# Altium PCB TinyArduino.PcbDoc
Units mil, origin at the board's own origin, x right, y up, seen from the top; angles counter-clockwise.
Board outline 1475 x 465 mil, 4 copper layers (Top Layer, GND_layer, 5V_layer, Bottom Layer), stack 23.756 mil thick; 13 components, 12 nets, 45 pads, 3 vias.
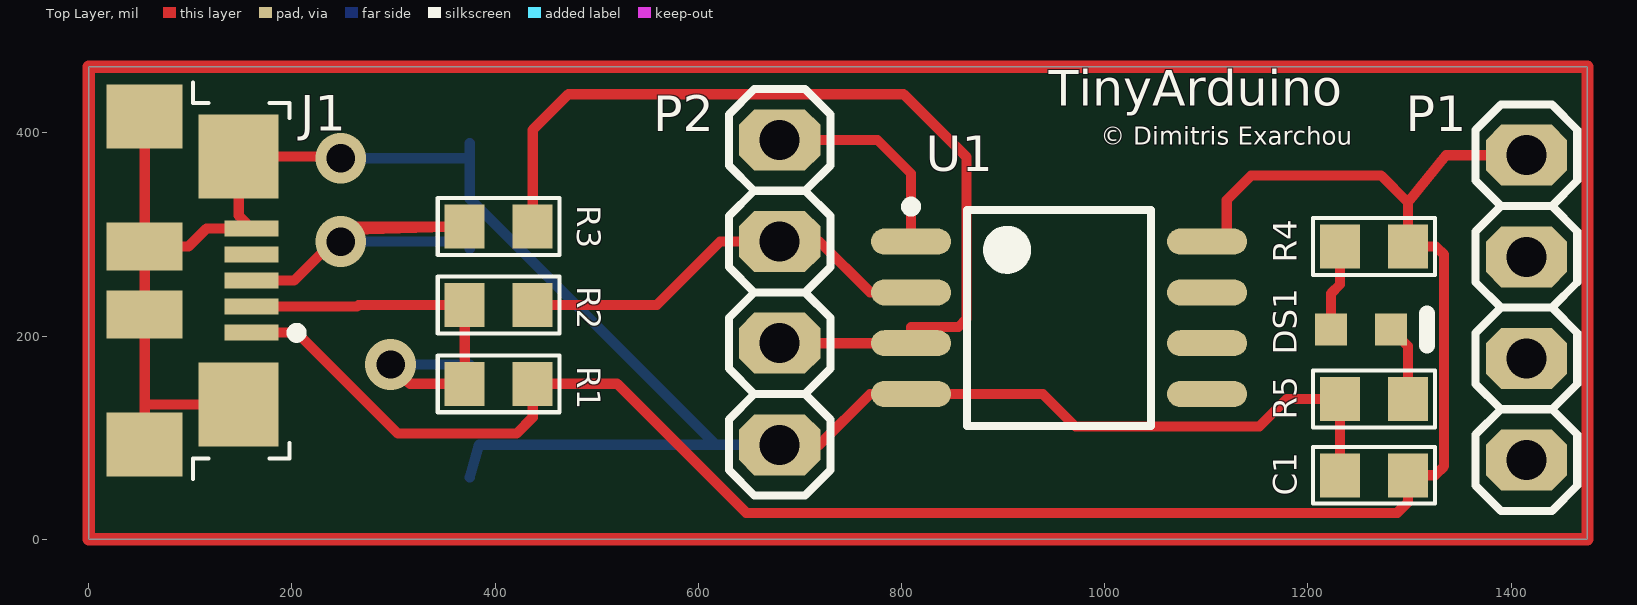
[diagram p0: Top Layer view]
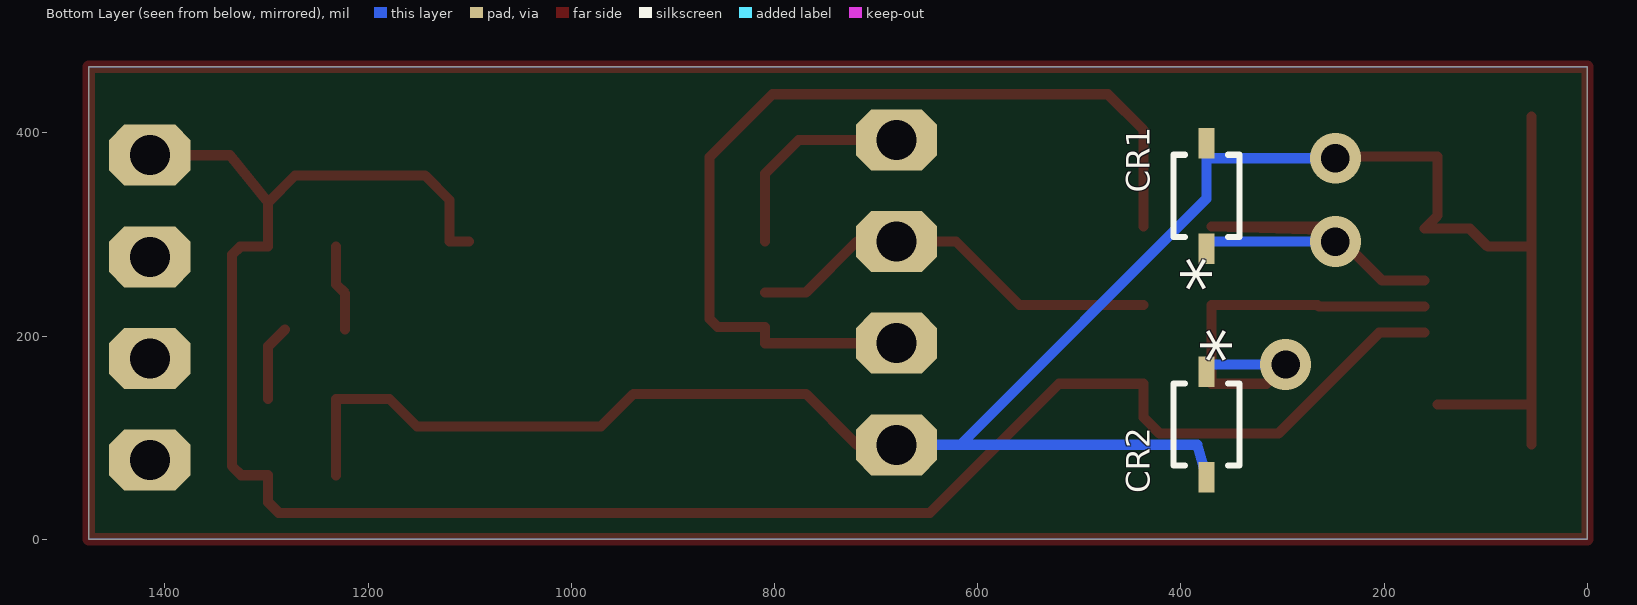
[diagram p1: Bottom Layer view, seen from below]
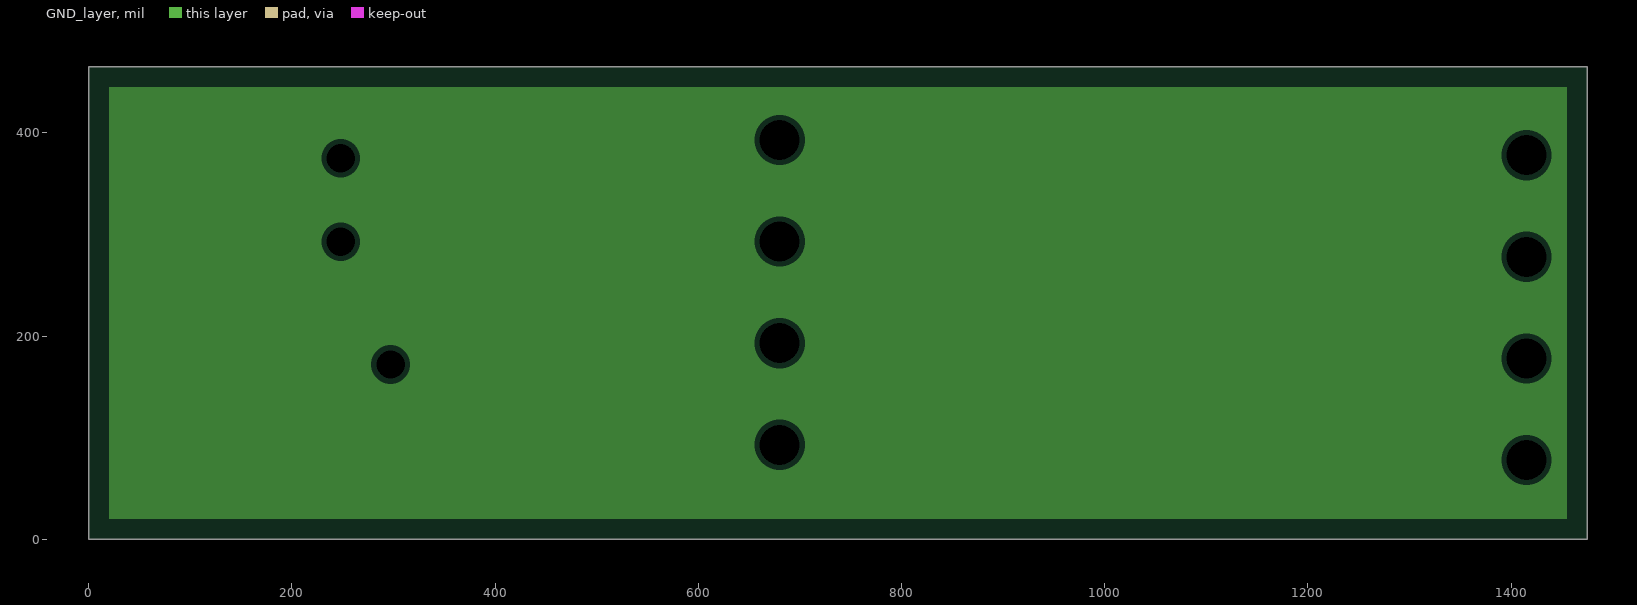
[diagram p2: GND_layer, clearances drawn from the general rule]
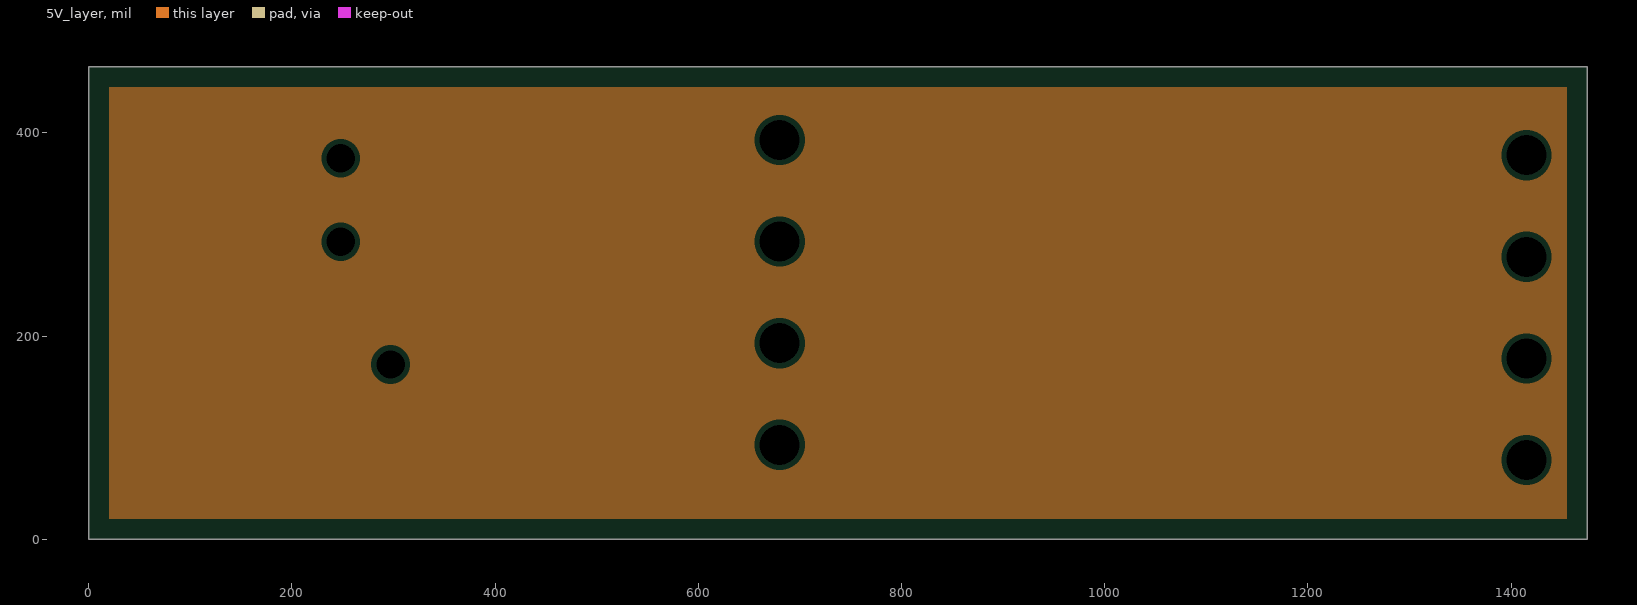
[diagram p3: 5V_layer, clearances drawn from the general rule]
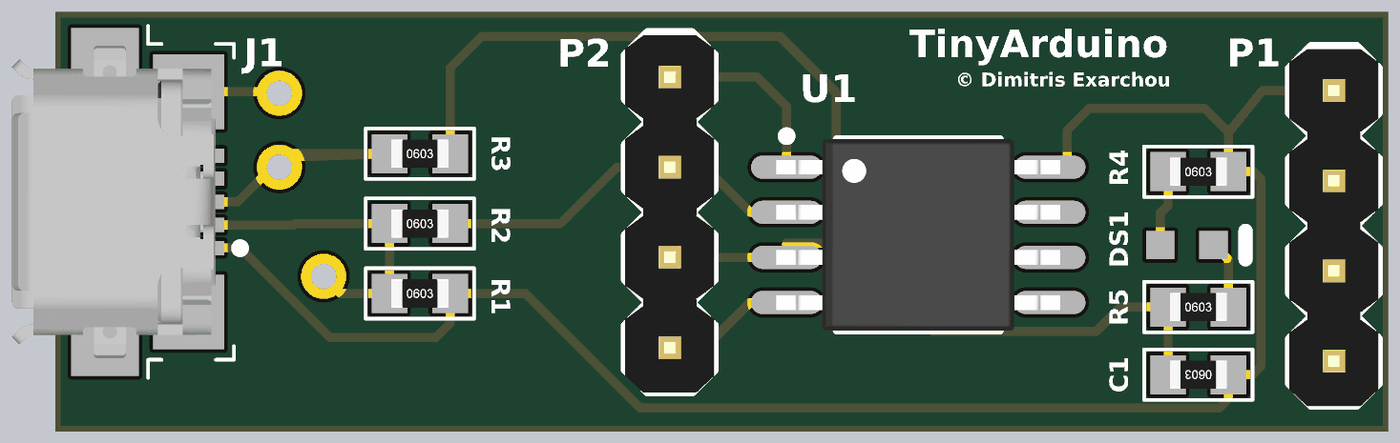
[diagram p4: 3D render of the assembled board from above, using the file's embedded part models]

## Layer stack, top to bottom
Top Solder: solder mask 0.4, Solder Resist, Dk 3.5
Top Layer: signal copper 1.4
Dielectric 2: prepreg 2.8, PP-006, Dk 4.1
GND_layer: plane copper 1.378
Dielectric 1: dielectric 12.6, FR-4, Dk 4.8
5V_layer: plane copper 1.378
Dielectric 3: prepreg 2.8, PP-006, Dk 4.1
Bottom Layer: signal copper 1.4
Bottom Solder: solder mask 0.4, Solder Resist, Dk 3.5

## Board outline
0,0 1475,0 1475,465 0,465

## Design rules (kind name [scope] priority, off if disabled: settings)
Clearance [All] p1: gap=10 ignorepadtopadclearanceinfootprint=FALSE except(0: Arc-Hole Track-Hole SMDPad-Hole THPad-Hole Via-Hole Fill-Hole Poly-Hole Region-Hole Text-Hole; 5: SMDPad-SMDPad)
PlaneClearance [All] p1: clearance=5
PlaneConnect [All] p1: planeconnectstyle=Relief reliefexpansion=20 reliefentries=4 reliefconductorwidth=10 reliefairgap=10
PolygonConnect [All] p1: connectstyle=Relief reliefconductorwidth=10 reliefentries=4 polygonreliefangle="90 Angle" airgapwidth=10
RoutingVias [All] p1: holewidth=28 width=50 viastyle="Through Hole" minholewidth=28 minwidth=50 maxholewidth=28 maxwidth=50
SilkToSilkClearance [All] p1: silktosilkclearance=12
SolderMaskExpansion [All] p1: expansion=4 istentingtop=FALSE
Width [All] p1: maxlimit=20 minlimit=5 preferedwidth=10
27 further rules are at their usual default settings.

## Classes and differential pairs
component class TinyArduino: C1 CR1 CR2 DS1 P1 P2 R1 R2 R3 R4 R5 U1

## Components (designator, comment, footprint, x,y, rotation, side; value= is the part's Value field where it differs from the comment)
C1 "100nF" MY_0603 1265,62.97 r180 top
CR1 "B0540WS-7" SOD323_DIO 375,337.97 r90 bottom
CR2 "B0540WS-7" SOD323_DIO 375,112.97 r270 bottom
DS1 "HSMG-C190" AVAG-HSMX-C190_V 1252.27,206.59 r0 top
J1 "ZX62R-B-5P" HIRO-ZX62R-B-5P_V 107.66,254.51 r270 top
P1 "Header 4" My_1X04 1415,227.97 r90 top
P2 "Header 4" My_1X04 680,242.97 r90 top
R1 "1.5K" MY_0603 403.46,152.97 r0 top
R2 "68R" MY_0603 403.46,230.47 r0 top
R3 "68R" MY_0603 403.46,307.97 r0 top
R4 "390R" MY_0603 1265,287.97 r0 top
R5 "0R" MY_0603 1265,137.97 r0 top
U1 "ATtiny85-20SU" ATML-8S2_M 955,217.97 r0 top

## Footprints (in the part's own frame and the unit in brackets; to place one, negate y for a bottom-side part, rotate by r counter-clockwise, add the part's x,y. Pads: shape width x height; smd on the part's side, far side on the other; paste and mask are expansions set on the pad)
ATML-8S2_M [mm] "SOIC, 8-Leads, Body 5.4x5.4mm, Pitch 1.27mm, IPC Low Density"
  oval 2x0.65 smd: 1(-3.7,1.905) 2(-3.7,0.635) 3(-3.7,-0.635) 4(-3.7,-1.905) 5(3.7,-1.905) 6(3.7,-0.635) 7(3.7,0.635) 8(3.7,1.905)
  silkscreen extent -3.82,-2.7 2.3,2.9, body extent -3.99,-2.7 3.99,2.7, height 2.16
AVAG-HSMX-C190_V [mm] "SMD, 2-Leads, Body 1.6x0.8mm, Height 0.9mm"
  rect 0.8x0.8 smd: 1(-0.75,0) 2(0.75,0)
  silkscreen extent 1.65,-0.4 1.65,0.4, body extent -0.8,-0.4 0.8,0.4, height 0.9
HIRO-ZX62R-B-5P_V [mm] "USB Micro-B R/A Connector"
  rect 0.4x1.35 smd: 1(1.3,1.338) 2(0.65,1.338) 3(0,1.338) 4(-0.65,1.338) 5(-1.3,1.338)
  rect 2.1x2 smd: 6(-3.1,1.013) 11(3.1,1.013)
  rect 1.6x1.9 smd: 7(-4.1,-1.338) 10(4.1,-1.338)
  rect 1.2x1.9 smd: 8(-0.85,-1.338) 9(0.85,-1.338)
  silkscreen extent -4.95,-0.13 4.95,2.58, body extent -4.4,-3.95 4.4,1.78, height 2.71
My_1X04 [mil]
  oct 60x80 hole 39.37: 1(-150,0) 2(-50,0) 3(50,0) 4(150,0)
  silkscreen extent -200,-50 200,50, body extent -200,-49 196,49, height 323
MY_0603 [mm]
  rect 1x1.1 smd: 1(-0.85,0) 2(0.85,0)
  silkscreen extent -1.52,-0.71 1.52,0.71, body extent -0.8,-0.4 0.8,0.4, height 0.44
SOD323_DIO [mil]
  rect 30x16 smd paste+0 mask+0: 1(-52,0) 2(52,0)
  silkscreen extent -40,-32 40,32, body extent -53,-27 53,27, height 47

## Part data
C1: library part "Cap ceramic", "None polar capacitor", ASiD Part Number=C-AS
CR1 CR2: "No Description Available", Mfr_Name="Diodes Inc", Copyright="Copyright (C) 2023 Ultra Librarian. All rights reserved.", Manufacturer_Part_Number=B0540WS-7, RefDes=RefDes, Type=DEV
DS1: library part CMP-007-00013-2, "LED Uni-Color Green, 52 mW, 20 mA, -40 to 85 degC, 2-Pin SMD, RoHS, Tape and Reel", Case/Package=0603, Colour=Green, Forward Current=20mA, Forward Voltage=2.2V, Manufacturer=Avago, Max Operating Temperature=85°C, Min Operating Temperature=-40°C, Package Description="2-Pin Surface Mount Device, Body 1.6 x 0.8 mm, Height 0.9 mm", Package Quantity=4000, Package Reference=HSMX-C190, Power=52mW, Datasheet URL=http://docs.avagotech.com/docs/AV02-0551EN, Datasheet Version=Mar-12, Illumination Colour=Green, Lens Style=Diffused, Luminous Intensity=15mcd, Manufacturer URL=http://www.avagotech.com/, Mounting Technology=SM, Nominal Vf=2.2V, Packaging=TapeandReel, Pins=2, RoHS Compliant=True, Viewing Angle=170degrees
J1: library part CMP-0031-00001-1, "Connector; USBMicro-B,Reverse type, SMT; 5 Position; Right Angle", Operating Temperature="-30 to 85 degC", ComponentLink1Description="Manufacturer URL", ComponentLink1URL=http://www.hirose.com/â€Ž, ComponentLink2Description=Datasheet, ComponentLink2URL=http://www.hirose.co.jp/cataloge_hp/e24200011.pdf, DatasheetVersion=08/2010, Mounting Technology="Surface Mount", PackageDescription="5-Pin USB Micro-B R/A Connector", PackageReference=ZX62R-B-5P, PartNumber=ZX62R-B-5P
P1 P2: "Header, 4-Pin", ASiD Part Number="Header 4-AS"
R1 R2 R3 R4 R5: library part Res, "Standard resistor", ASiD Part Number=Res-AS
U1: library part CMP-020-00006-3, "8-bit AVR Microcontroller with In-System Programmable Flash, 2.7 to 5.5 V, 20 MHz, 8 KB Flash, 0.5 KB EEPROM, 0.5 KB SRAM, -40 to 85 degC, 8-Pin SOIC (8S2), RoHS, Tube", Case/Package=SOIC, Frequency=20MHz, Manufacturer=Atmel, Max Operating Temperature=85°C, Max Supply Voltage=5.5V, Min Operating Temperature=-40°C, Min Supply Voltage=2.7V, Package Description="8-Pin Small Outline Integrated Circuit Package, Body 5.29 x 5.24 mm, Pitch 1.27 mm", Package Quantity=95, Package Reference=8S2, ADC Channels=4, Datasheet URL=http://www.atmel.com/Images/Atmel-2586-AVR-8-bit-Microcontroller-ATtiny25-ATtiny45-ATtiny85_Datasheet.pdf, Datasheet Version="Rev. 2586Q, 08/2013", Density=8KB, I/Os=6, Interface=SPI, Manufacturer URL=http://www.atmel.com/, Max Clock Frequency=20MHz, Mounting Technology=SM, Packaging=Rail/Tube, Pins=8, PWM Channels=6, RAM Size=512B, RoHS Compliant=True, UART Channels=1, USB Channels=0

## Via types
v1: diameter 50, hole 28, Top Layer to Bottom Layer, 3 vias

## Nets (pads, with @x,y where several pads share a name; then routed paths per layer and width w, separated by ;. In a path a pad name is that pad's centre, name@x,y a point inside that pad or via, vN(x,y) a via of type N, cw(c..) or ccw(c..) an arc to the next point about the centre after c; other vN are vias at no path point)
+5: C1.1 J1.1 P1.4 R1.2 R4.2 U1.8 | length 2030.5
  Top Layer w10: J1.1 205,203.32 304.35,103.97 420.93,103.97 436.93,119.97 R1.2 520,152.97 647,25.97 1288,25.97 1298.46,36.43 C1.1 1325,62.97 1334,71.97 1334,279.97 1326,287.97 R4.2 1298.46,331.51 ; U1.8 1120,292.97 1120,333.97 1144,357.97 1272,357.97 1298.46,331.51 ; P1.4 1336,377.97 1298.46,331.51
\R\E\S\E\T: DS1.2 R5.2 | length 75.5
  Top Layer w10: DS1.2 1298.46,189.93 R5.2
GND: C1.2 CR1.2 CR2.2 J1.5 J1.6 J1.7 J1.8 J1.9 J1.10 J1.11 P2.1 R5.1 U1.4 | length 2230.5
  Top Layer w10: J1.10 55,132.46 ; J1.7 J1.8 ; J1.11 55,132.46 ; v1(248,374.97) 246.42,376.55 J1.6 147.52,318.48 J1.5 115.72,305.69 98,287.97 J1.8 ; P2.1 719,92.97 769,142.97 U1.4 939,142.97 971,110.97 1152,110.97 1179,137.97 R5.1 C1.2 ; 55,132.46 J1.9 J1.8
  Bottom Layer w10: v1(248,374.97) CR1.2@375,374.97 ; CR2.2 384,92.97 617,92.97 ; CR1.2 CR1.2@375,374.97 ; P2.1 617,92.97 ; CR1.2@375,374.97 375,334.97 617,92.97
NetCR1_1: CR1.1 J1.3 R3.1 | length 495.7
  Top Layer w10: J1.3 202,254.51 255.46,307.97 v1@259.23,304.2 ; v1(248,292.97) v1@259.23,304.2 ; v1@259.23,304.2 263,307.97 R3.1 v1@259.23,304.2
  Bottom Layer w10: v1(248,292.97) 375,292.97 CR1.1
NetCR2_1: CR2.1 J1.2 R1.1 R2.1 | length 453.7
  Top Layer w10: J1.2 264,228.91 265.56,230.47 R2.1 R1.1 316,152.97 v1(297,171.97)
  Bottom Layer w10: v1(297,171.97) 375,171.97 CR2.1
NetDS1_1: DS1.1 R4.1 | length 85
  Top Layer w10: DS1.1 1222.75,241.97 1231.54,250.76 R4.1
PB0: U1.5
PB1: U1.6
PB2: U1.7
PB3: P2.3 R2.2 U1.2 | length 419
  Top Layer w10: R2.2 559,230.47 621.5,292.97 P2.3 719,292.97 769,242.97 U1.2
PB4: P2.2 R3.2 U1.3 | length 924.5
  Top Layer w10: R3.2 436.93,402.9 472,437.97 802,437.97 864,375.97 864,216.97 856,208.97 809.33,208.97 U1.3 P2.2
RESET: P2.4 U1.1 | length 210
  Top Layer w10: P2.4 776.33,392.97 809.33,359.97 U1.1
pads on no net: J1.4 P1.1 P1.2 P1.3
copper on no net: | length 3878
  Top Layer w12: 1475,462.97 1475,0 0,0 0,465 1475,465

## Polygon pours and split planes (outlines as drawn)
no net on Bottom Layer "NONET_L04_P000" (solid, remove dead copper, shelved, pour order 0): 0,0 1475,0 1475,465 0,465
no net on 5V_layer (split plane): 1454.9,20.1 20.1,20.1 20.1,444.9 1454.9,444.9
no net on GND_layer (split plane): 1454.9,20.1 20.1,20.1 20.1,444.9 1454.9,444.9

## Silkscreen, mask and mechanical layers (free items; w line width, h text height)
Top Overlay:
  text "TinyArduino" at 945,414.99 h60
  text "© Dimitris Exarchou" at 996.07,382.52 h30

## Text inside footprints (layer, text, board x,y; h text height)
CR1: Mechanical 13 "*" at 350,299.97 h50 r270; Bottom Overlay "*" at 350,243.47 h50 r270
CR2: Mechanical 13 "*" at 400,150.97 h50 r90; Bottom Overlay "*" at 400,207.47 h50 r90
J1: Mechanical 1 "Board edge" at 2.66,34.51 h7.87 r270